# EAGLE board rf-v2 (EAGLE 6.4)
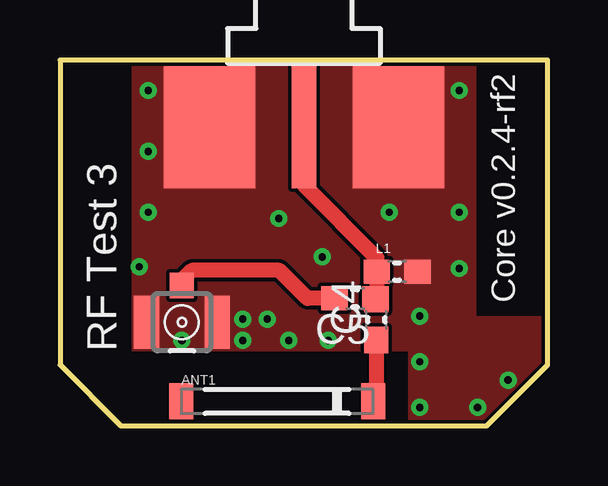
[diagram p0: board, top side]
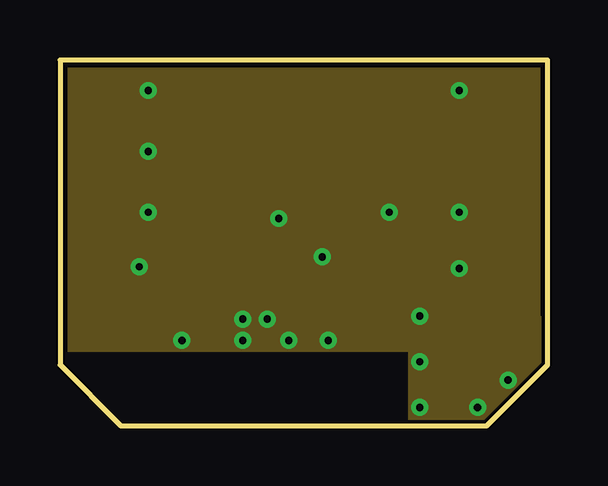
[diagram p1: board, inner layer $GND]
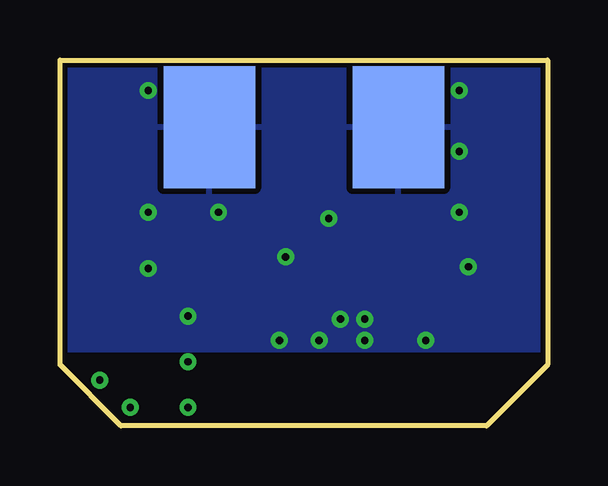
[diagram p2: board, bottom side, seen from below]

Size 20.32 x 15.24 mm. Coordinates in mm from the lower left corner, seen from the top.
Outline: 0,15.24 0,2.54 2.54,0 17.78,0 20.32,2.54 20.32,15.24 0,15.24
Copper layers (1+2*15+16): Top 0.035mm / dielectric 1.5mm / $GND 0.035mm / dielectric 0.15mm / $+3V3 0.035mm / dielectric 0.2mm / Bottom 0.035mm
Design rules "spark": minimum track width 6mil, minimum drill 0.3mm, track to track 6mil, track to pad 6mil, pad to pad 6mil, via to via 6mil, smd to smd 6mil, copper to edge 6mil, drill to drill 6mil, minimum pad ring 12mil, minimum via ring 8mil, stop-mask expansion 4mil, vias tented up to drill 20mil, thermal gap 10mil
Net classes: 2 RF: width 0.635 mm, clearance 0.635 mm; 3 RF2: width 0.584 mm, clearance 1.143 mm

## Footprints (pad centres in the part's own frame; a part is rotated, then mirrored left to right if it is on the bottom)
AT8010 = smd 1 x 1.5: NC -4,0; SIG 4,0
C0603 = smd 1.1 x 1: 1 -0.85,0; 2 0.85,0
0603 = smd 1.1 x 1: 1 -0.85,0; 2 0.85,0
ANDYW-GENERIC-END-LAUNCH = smd 5.08 x 1.016: 1 2.565,0 | smd 5.08 x 3.81: G@1 2.565,3.937; G@2 2.565,-3.937 | smd 5.08 x 3.81 bottom: G@3 2.565,3.937; G@4 2.565,-3.937
IPEX-20279-001E = smd 1 x 1.05: 1 0,1.528 | smd 1.05 x 2.2: 2@1 -1.475,0; 2@2 1.475,0

## Placement (x,y rotation side)
ANT1  AT8010  [AT8010]  9.04,1.02 0 top
C4  2.2pF  [C0603]  13.18,4.42 90 top
C5  10pF  [C0603]  12.29,5.31 180 top
L1  2.2nH  [0603]  14.05,6.43 0 top
X1  SMA-142-0701-881/886  [ANDYW-GENERIC-END-LAUNCH]  10.16,15.01 270 top
X2  IPEX-20279-001E  [IPEX-20279-001E]  5.08,4.32 0 top

## Library data of the parts
ANT1 X2 = Spark
C4 C5 = rcl
L1 = SparkFun-Passives
X1 = andyw-oct-2011; MF: JOHNSON COMPONENTS; MPN: 142-0701-881; OC_FARNELL: 1608603; OC_NEWARK: 08B906

## Nets
GND [vcc]: L1.2 X1.G@1 X1.G@2 X1.G@3 X1.G@4 X2.2@1 X2.2@2
N$2 [RF]: C5.2 X2.1
N$3 [RF]: ANT1.SIG C4.1
N$4 [RF]: X1.1
N$5 [RF]: C4.2 C5.1 L1.1

## Tracks (layer width: path | path; a pad name or v marks a point on that pad's centre or on a via)
GND  (via drill 0.3)
  other vias: 3.3,6.63 3.68,13.97 3.68,11.43 16.64,13.97 16.64,8.89 13.72,8.89 3.68,8.89 9.12,8.64 16.64,6.55 10.92,7.04 5.08,3.56 7.62,3.56 9.53,3.56 11.18,3.56 8.64,4.45 7.62,4.45 18.67,1.91 17.4,0.76 14.99,0.76 14.99,2.67 14.99,4.57
  pour $GND (isolate 0.203): 0,15.24 20.32,15.24 20.32,3.17 0,3.17
  pour Top: 0,2.54 0,8.25 0,8.89
  pour Bottom (isolate 0.203): 0,15.24 20.32,15.24 20.32,3.17 0,3.17
  pour Top (no thermals): 3.05,3.17 3.05,15.75 17.27,15.75 17.27,3.17
  pour Top (no thermals): 14.61,4.45 14.61,0 17.78,0 20.32,2.54 20.32,4.45
  pour $GND (no thermals): 14.61,4.45 14.61,0 17.78,0 20.32,2.54 20.32,4.45
N$2
  Top 0.635: X2.1 5.08,6.06 5.5,6.48 9.14,6.48 10.31,5.31 C5.2
N$3
  Top 0.635: C4.1 13.18,1.16 ANT1.SIG
N$4
  Top 0.635: X1.1 10.16,10.03 13.21,6.99 13.21,6.48
N$5
  Top 0.635: C4.2 C5.1 13.2,5.36 L1.1 13.16,6.46

## Text on the board
tPlace: Core v0.2.4-rf2 | RF Test 3